# Altium PCB AEGIS_Junction_Box.PcbDoc (part 1 of 2)
Units mm, origin at the board's own origin, x right, y up, seen from the top; angles counter-clockwise.
Board outline 97 x 168.43 mm, 2 copper layers (TOP, BOTTOM), stack 1.57 mm thick; 144 components, 74 nets, 423 pads, 143 vias.
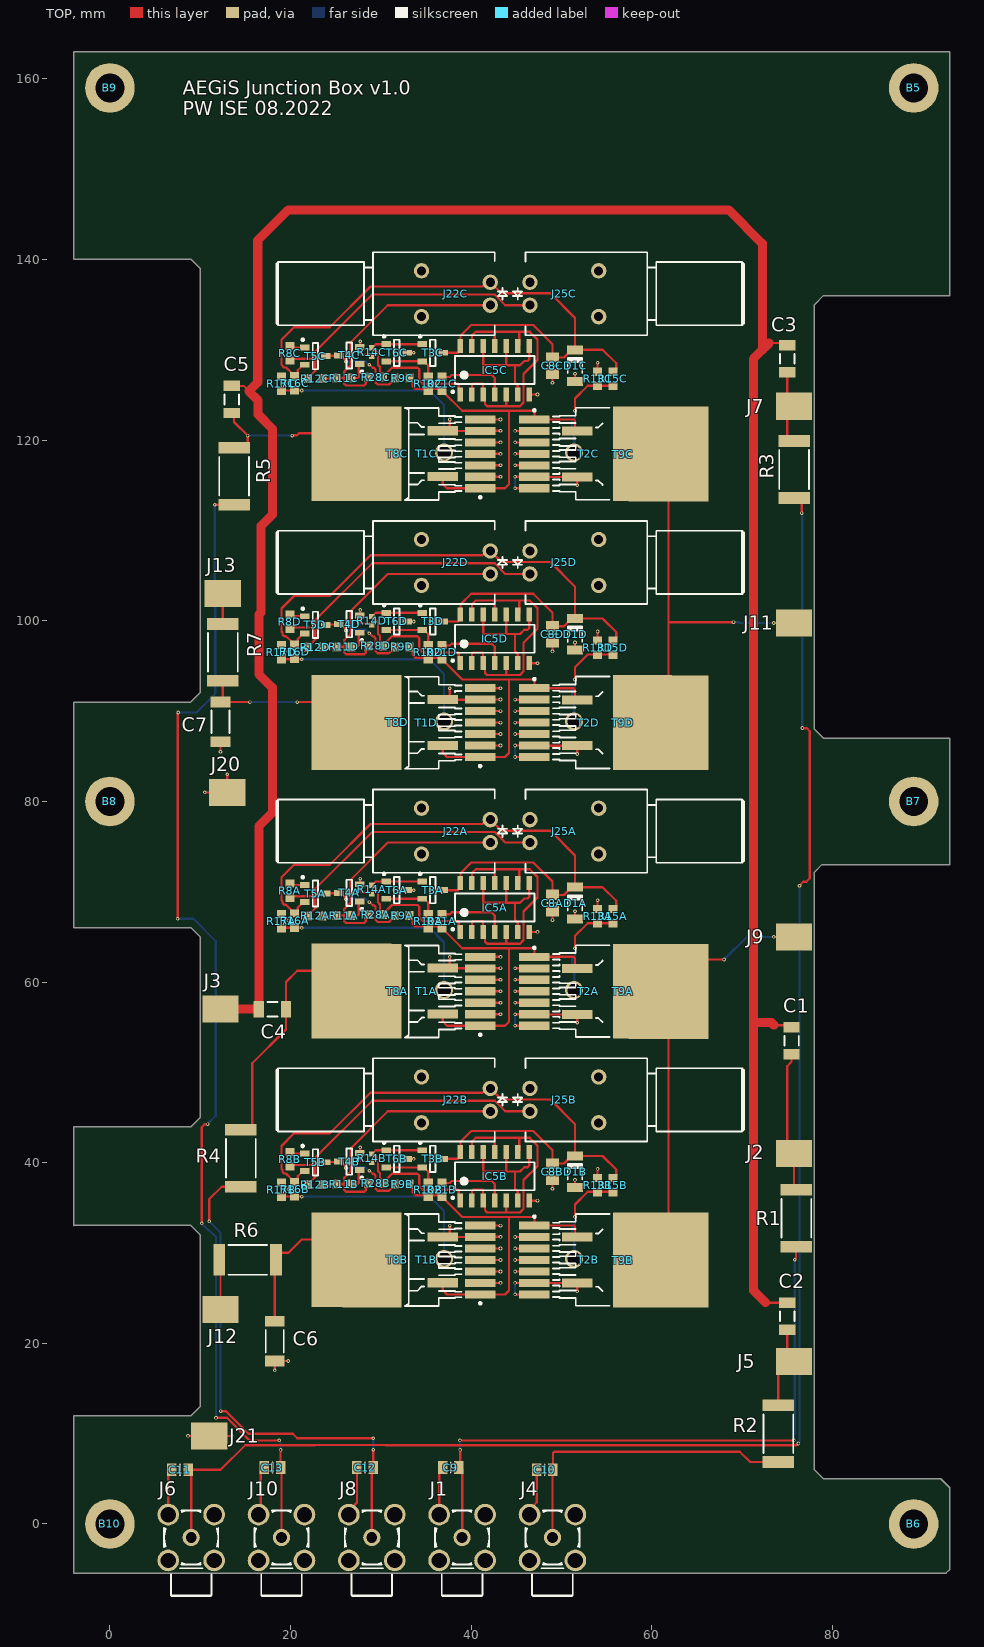
[diagram p0: TOP view]
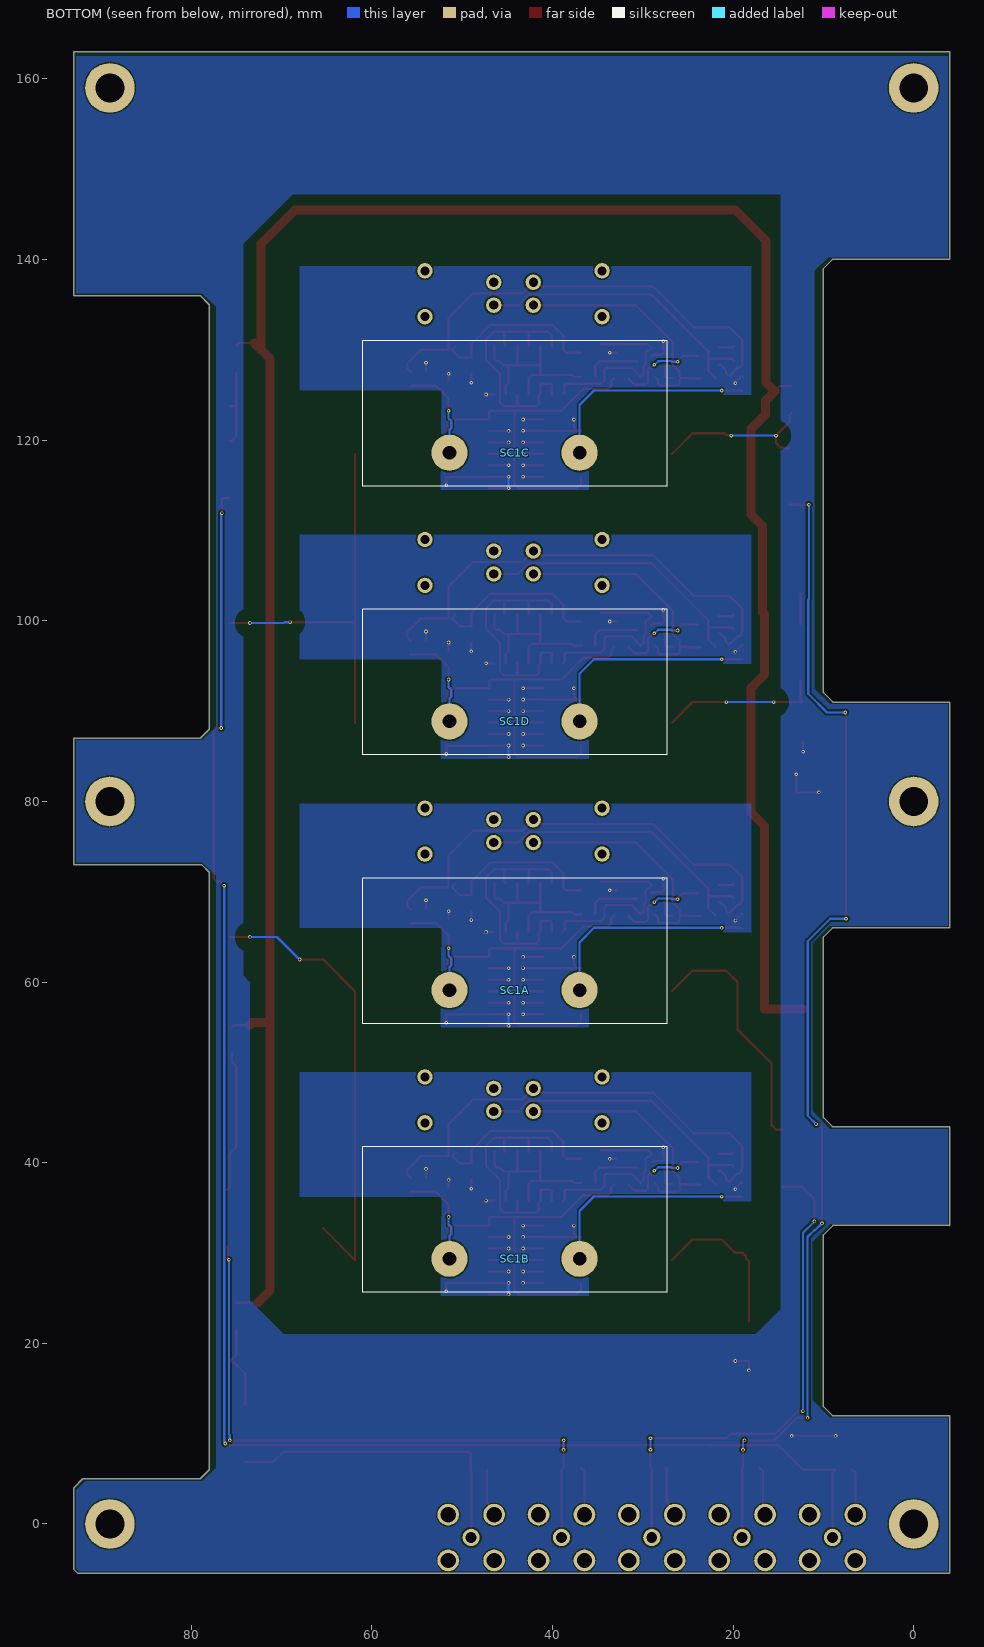
[diagram p1: BOTTOM view, seen from below]
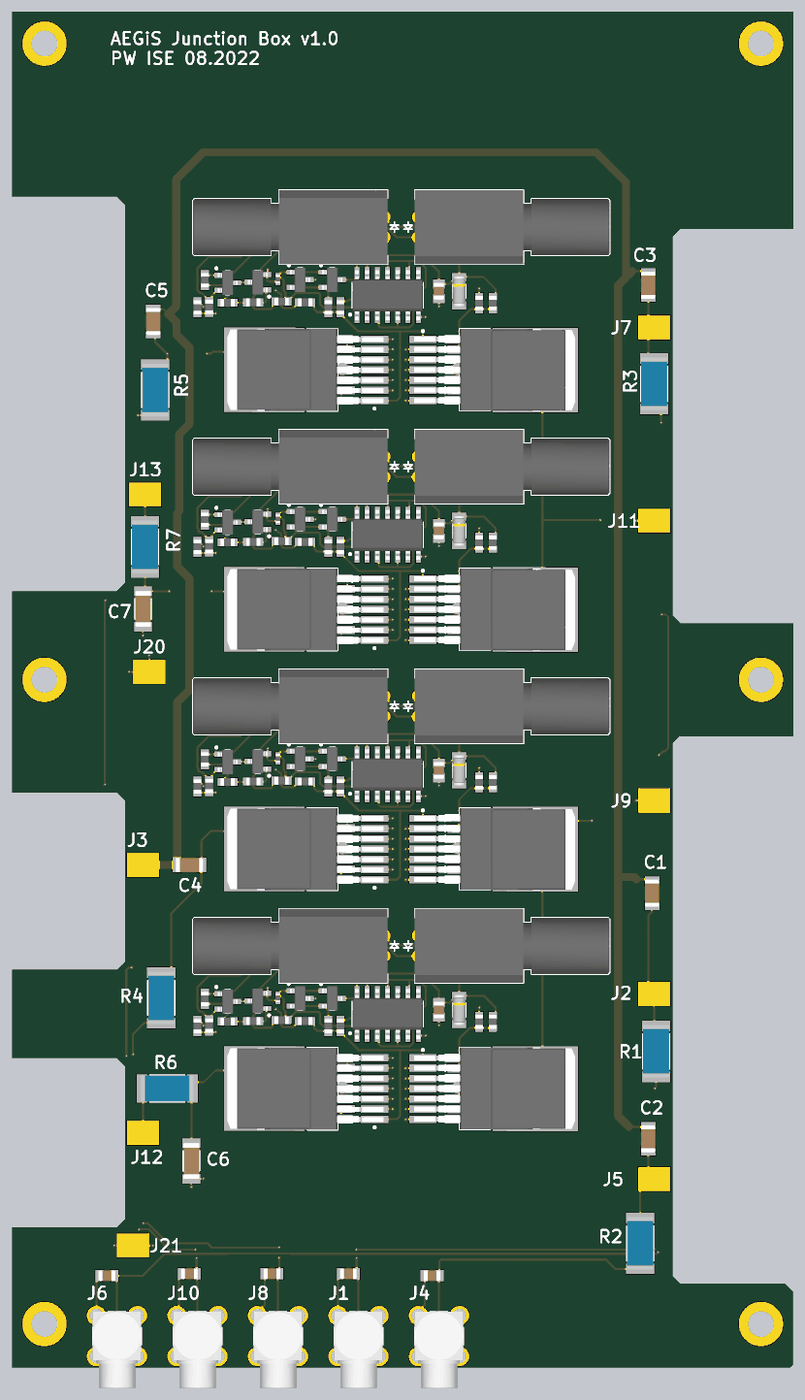
[diagram p2: 3D render of the assembled board from above, using the file's embedded part models]

## Layer stack, top to bottom
TopSolder: solder mask 0.01, Solder Resist, Dk 3.5
TOP: signal copper 0.035
Dielectric 3: prepreg 1.5, FR-4, Dk 4.8
BOTTOM: signal copper 0.035
BottomSolder: solder mask 0.01, Solder Resist, Dk 3.5

## Board outline
-4,-5.428 -4,12 9,12 10,13 10,32 8.95,33.05 -3.95,33.05 -4,33 -4,44 9,44 10,45 10,65 9,66 -4,66 -4,91 8.95,91 10,92.05 10,111 10,139 9,140 -4,140 -4,163 93,163 93,136 79,136 78,135 78,88 79,87 93,87 93,73 78.85,73 78,72.15 78,6 79,5 92,5 92.987,4.013 92.987,-5.025 92.581,-5.431 -3.997,-5.431

## Design rules (kind name [scope] priority, off if disabled: settings)
AcuteAngle [All] p1: minimum=6.00000000000000E+0001 checktracksonly=FALSE
BoardOutlineClearance [All] p1: gap=0.1 ignorepadtopadclearanceinfootprint=FALSE
Clearance Clearance_HV [InNetClass('HV')] p1: gap=1.5 ignorepadtopadclearanceinfootprint=FALSE
Clearance [All] p2: gap=0.2 ignorepadtopadclearanceinfootprint=FALSE
HoleSize [All] p1: absolutevalues=TRUE maxlimit=4 minlimit=0.2 maxpercent=80.000 minpercent=20.000
MinimumSolderMaskSliver [All] p1: minsoldermaskwidth=0.1
PlaneClearance [All] p1: clearance=0.127
PlaneConnect [All] p1: planeconnectstyle=Relief reliefexpansion=0.152 reliefentries=4 reliefconductorwidth=0.152 reliefairgap=0.152
PolygonConnect [All] p1: thpad.connectstyle=Relief thpad.reliefconductorwidth=0.127 thpad.reliefentries=4 thpad.polygonreliefangle="90 Angle" thpad.airgapwidth=0.127 smdpad.connectstyle=Relief smdpad.reliefconductorwidth=0.127 smdpad.reliefentries=4 smdpad.polygonreliefangle="90 Angle" smdpad.airgapwidth=0.127 via.connectstyle=Direct via.reliefconductorwidth=0.127 via.reliefentries=4 via.polygonreliefangle="90 Angle" via.airgapwidth=0.127
RoomDefinition SPDT_HV_SW3 [InComponentClass('SPDT_HV_SW3')] p1: confinementstyle=ConfineIn formatcopy=TRUE lockcomponents=FALSE outline 18,111.5 18,83 70.5,83 70.5,111.5
RoomDefinition SPDT_HV_SW0 [InComponentClass('SPDT_HV_SW0')] p2: confinementstyle=ConfineIn formatcopy=TRUE lockcomponents=FALSE outline 18,81.75 18,53.25 70.5,53.25 70.5,81.75
RoomDefinition AEGIS_Junction_Box [InComponentClass('AEGIS_Junction_Box')] p3 off: confinementstyle=ConfineIn formatcopy=TRUE lockcomponents=FALSE outline 86,-5 78,-5 78,4 86,4
RoomDefinition SPDT_HV_SW2 [InComponentClass('SPDT_HV_SW2')] p4: confinementstyle=ConfineIn formatcopy=TRUE lockcomponents=FALSE outline 18,141.25 18,112.75 70.5,112.75 70.5,141.25
RoomDefinition SPDT_HV_SW1 [InComponentClass('SPDT_HV_SW1')] p5: confinementstyle=ConfineIn formatcopy=TRUE lockcomponents=FALSE outline 18,52 18,23.5 70.5,23.5 70.5,52
RoutingVias [All] p1: holewidth=0.2 width=0.4 viastyle="Through Hole" minholewidth=0.2 minwidth=0.4 maxholewidth=0.711 maxwidth=1.27
SilkToSilkClearance [All] p1: silktosilkclearance=0.01
SilkToSolderMaskClearance [IsPad] p1: minsilkscreentomaskgap=0.01 clearancetoexposedcopper=TRUE
SolderMaskExpansion [All] p1: expansion=0.102 istentingtop=FALSE
Width [All] p1: maxlimit=1.016 minlimit=0.15 preferedwidth=0.2
24 further rules are at their usual default settings.

## Classes and differential pairs
net class HV: "Electrode 1" "Electrode 2" "Electrode 3" "Electrode 4" "Electrode 5" HV_0.7K HV_1K NetC4_2 NetC5_2 NetC6_1 NetC7_1 Resonator
channel class SPDT_FET_SW: SPDT_HV_SW0 SPDT_HV_SW1 SPDT_HV_SW2 SPDT_HV_SW3
component class SPDT_HV_SW3: C8D D1D IC5D J22D J25D R8D R9D R10D R11D R12D R13D R14D R15D R16D R17D R21D R28D SC1D T1D T2D T3D T4D T5D T6D T8D T9D
component class SPDT_HV_SW1: C8B D1B IC5B J22B J25B R8B R9B R10B R11B R12B R13B R14B R15B R16B R17B R21B R28B SC1B T1B T2B T3B T4B T5B T6B T8B T9B
component class SPDT_HV_SW2: C8C D1C IC5C J22C J25C R8C R9C R10C R11C R12C R13C R14C R15C R16C R17C R21C R28C SC1C T1C T2C T3C T4C T5C T6C T8C T9C
component class SPDT_HV_SW0: C8A D1A IC5A J22A J25A R8A R9A R10A R11A R12A R13A R14A R15A R16A R17A R21A R28A SC1A T1A T2A T3A T4A T5A T6A T8A T9A
component class AEGIS_Junction_Box: B5 B6 B7 B8 B9 B10 C1 C2 C3 C4 C5 C6 C7 C9 C10 C11 C12 C13 J1 J2 J3 J4 J5 J6 J7 J8 J9 J10 J11 J12 J13 J20 J21 R1 R2 R3 R4 R5 R6 R7

## Components (designator, comment, footprint, x,y, rotation, side; value= is the part's Value field where it differs from the comment)
B5 "Plated Hole" MTG320_550 89,159 r0 top
B6 "Plated Hole" MTG320_550 89,0 r0 top
B7 "Plated Hole" MTG320_550 89,80 r0 top
B8 "Plated Hole" MTG320_550 0,80 r0 top
B9 "Plated Hole" MTG320_550 0,159 r0 top
B10 "Plated Hole" MTG320_550 0,0 r0 top
C1 "100pF" CAPC3216X180N 75.475,53.5 r270 top
C2 "100pF" CAPC3216X180N 75,23 r270 top
C3 "100pF" CAPC3216X180N 75,129 r270 top
C4 "100pF" CAPC3216X180N 18,57 r0 top
C5 "100pF" CAPC3216X180N 13.5,124.5 r270 top
C6 "470pF" CAPC4520X150N 18.25,20.25 r270 top
C7 "470pF" CAPC4520X150N 12.25,88.8 r270 top
C8A "22uF" CAPC2012X145N 49,68.75 r90 top (schematic designator C8)
C8B "22uF" CAPC2012X145N 49,39 r90 top (schematic designator C8)
C8C "22uF" CAPC2012X145N 49,128.25 r90 top (schematic designator C8)
C8D "22uF" CAPC2012X145N 49,98.5 r90 top (schematic designator C8)
C9 "100pF" CAPC2012X135N 37.75,6.25 r0 top
C10 "100pF" CAPC2012X135N 48.15,6 r0 top
C11 "100pF" CAPC2012X135N 7.75,6 r0 top
C12 "100pF" CAPC2012X135N 28.25,6.25 r0 top
C13 "100pF" CAPC2012X135N 18,6.25 r0 top
D1A "BZV55-B5V1" DIOMELF3515N 51.5,68.75 r270 top (schematic designator D1)
D1B "BZV55-B5V1" DIOMELF3515N 51.5,39 r270 top (schematic designator D1)
D1C "BZV55-B5V1" DIOMELF3515N 51.5,128.25 r270 top (schematic designator D1)
D1D "BZV55-B5V1" DIOMELF3515N 51.5,98.5 r270 top (schematic designator D1)
IC5A "CD40106BM" SOIC127P600X175-14N 42.62,68.25 r90 top (schematic designator IC5)
IC5B "CD40106BM" SOIC127P600X175-14N 42.62,38.5 r90 top (schematic designator IC5)
IC5C "CD40106BM" SOIC127P600X175-14N 42.62,127.75 r90 top (schematic designator IC5)
IC5D "CD40106BM" SOIC127P600X175-14N 42.62,98 r90 top (schematic designator IC5)
J1 "MCX" AMPHENOL_919-383J-51A 39,-1.5 r270 top
J2 "SMD Pad" R400X300 75.75,41 r0 top
J3 "SMD Pad" R400X300 12.25,57 r0 top
J4 "MCX" AMPHENOL_919-383J-51A 49,-1.5 r270 top
J5 "SMD Pad" R400X300 75.75,18 r0 top
J6 "MCX" AMPHENOL_919-383J-51A 9,-1.5 r270 top
J7 "SMD Pad" R400X300 75.75,123.75 r0 top
J8 "MCX" AMPHENOL_919-383J-51A 29,-1.5 r270 top
J9 "SMD Pad" R400X300 75.75,65 r0 top
J10 "MCX" AMPHENOL_919-383J-51A 19,-1.5 r270 top
J11 "SMD Pad" R400X300 75.75,99.75 r0 top
J12 "SMD Pad" R400X300 12.25,23.75 r0 top
J13 "SMD Pad" R400X300 12.5,103 r0 top
J20 "SMD Pad" R400X300 13,81 r0 top
J21 "SMD Pad" R400X300 11,9.75 r0 top
J22A "SFH250V" SFH250V 42.12,76.71 r180 top (schematic designator J22)
J22B "SFH250V" SFH250V 42.12,46.96 r180 top (schematic designator J22)
J22C "SFH250V" SFH250V 42.12,136.21 r180 top (schematic designator J22)
J22D "SFH250V" SFH250V 42.12,106.46 r180 top (schematic designator J22)
J25A "SFH250V" SFH250V 46.5,76.71 r0 top (schematic designator J25)
J25B "SFH250V" SFH250V 46.5,46.96 r0 top (schematic designator J25)
J25C "SFH250V" SFH250V 46.5,136.21 r0 top (schematic designator J25)
J25D "SFH250V" SFH250V 46.5,106.46 r0 top (schematic designator J25)
R1 "10K" RESC6532X80N 76,33.85 r90 top
R2 "10K" RESC6532X80N 74,10 r90 top
R3 "10K" RESC6532X80N 75.75,116.75 r90 top
R4 "10K" RESC6532X80N 14.5,40.5 r90 top
R5 "10K" RESC6532X80N 13.75,116 r90 top
R6 "10K" RESC6532X80N 15.25,29.25 r0 top
R7 "10K" RESC6532X80N 12.5,96.5 r270 top
R8A "10" RESC1608X55N 19.925,70.125 r90 top (schematic designator R8)
R8B "10" RESC1608X55N 19.925,40.375 r90 top (schematic designator R8)
R8C "10" RESC1608X55N 19.925,129.625 r90 top (schematic designator R8)
R8D "10" RESC1608X55N 19.925,99.875 r90 top (schematic designator R8)
R9A "10" RESC1608X55N 32.375,67.368 r0 top (schematic designator R9)
R9B "10" RESC1608X55N 32.375,37.618 r0 top (schematic designator R9)
R9C "10" RESC1608X55N 32.375,126.868 r0 top (schematic designator R9)
R9D "10" RESC1608X55N 32.375,97.118 r0 top (schematic designator R9)
R10A "10" RESC1608X55N 35.25,66.75 r270 top (schematic designator R10)
R10B "10" RESC1608X55N 35.25,37 r270 top (schematic designator R10)
R10C "10" RESC1608X55N 35.25,126.25 r270 top (schematic designator R10)
R10D "10" RESC1608X55N 35.25,96.5 r270 top (schematic designator R10)
R11A "10" RESC1608X55N 25.918,67.368 r0 top (schematic designator R11)
R11B "10" RESC1608X55N 25.918,37.618 r0 top (schematic designator R11)
R11C "10" RESC1608X55N 25.918,126.868 r0 top (schematic designator R11)
R11D "10" RESC1608X55N 25.918,97.118 r0 top (schematic designator R11)
R12A "10" RESC1608X55N 22.75,67.318 r0 top (schematic designator R12)
R12B "10" RESC1608X55N 22.75,37.568 r0 top (schematic designator R12)
R12C "10" RESC1608X55N 22.75,126.818 r0 top (schematic designator R12)
R12D "10" RESC1608X55N 22.75,97.068 r0 top (schematic designator R12)
R13A "Undefined" RESC1608X55N 54,67.275 r90 top (schematic designator R13)
R13B "Undefined" RESC1608X55N 54,37.525 r90 top (schematic designator R13)
R13C "Undefined" RESC1608X55N 54,126.775 r90 top (schematic designator R13)
R13D "Undefined" RESC1608X55N 54,97.025 r90 top (schematic designator R13)
R14A "1M" RESC1005X40N 29,70.25 r90 top (schematic designator R14)
R14B "1M" RESC1005X40N 29,40.5 r90 top (schematic designator R14)
R14C "1M" RESC1005X40N 29,129.75 r90 top (schematic designator R14)
R14D "1M" RESC1005X40N 29,100 r90 top (schematic designator R14)
R15A "0" RESC1608X55N 55.69,67.275 r90 top (schematic designator R15)
R15B "0" RESC1608X55N 55.69,37.525 r90 top (schematic designator R15)
R15C "0" RESC1608X55N 55.69,126.775 r90 top (schematic designator R15)
R15D "0" RESC1608X55N 55.69,97.025 r90 top (schematic designator R15)
R16A "Undefined" RESC1608X55N 20.45,66.81 r90 top (schematic designator R16)
R16B "Undefined" RESC1608X55N 20.45,37.06 r90 top (schematic designator R16)
R16C "Undefined" RESC1608X55N 20.45,126.31 r90 top (schematic designator R16)
R16D "Undefined" RESC1608X55N 20.45,96.56 r90 top (schematic designator R16)
R17A "0" RESC1608X55N 19,66.75 r90 top (schematic designator R17)
R17B "0" RESC1608X55N 19,37 r90 top (schematic designator R17)
R17C "0" RESC1608X55N 19,126.25 r90 top (schematic designator R17)
R17D "0" RESC1608X55N 19,96.5 r90 top (schematic designator R17)
R21A "10" RESC1608X55N 36.75,66.75 r270 top (schematic designator R21)
R21B "10" RESC1608X55N 36.75,37 r270 top (schematic designator R21)
R21C "10" RESC1608X55N 36.75,126.25 r270 top (schematic designator R21)
R21D "10" RESC1608X55N 36.75,96.5 r270 top (schematic designator R21)
R28A "0" RESC1608X55N 29.445,67.475 r0 top (schematic designator R28)
R28B "0" RESC1608X55N 29.445,37.725 r0 top (schematic designator R28)
R28C "0" RESC1608X55N 29.445,126.975 r0 top (schematic designator R28)
R28D "0" RESC1608X55N 29.445,97.225 r0 top (schematic designator R28)
SC1A "SM340K10L" SM340K10L 27.3,55.41 r0 bottom (schematic designator SC1)
SC1B "SM340K10L" SM340K10L 27.3,25.66 r0 bottom (schematic designator SC1)
SC1C "SM340K10L" SM340K10L 27.3,114.91 r0 bottom (schematic designator SC1)
SC1D "SM340K10L" SM340K10L 27.3,85.16 r0 bottom (schematic designator SC1)
T1A "C2M1000170J" WOLFSPEED_TO-263-7 32.922,58.965 r90 top (schematic designator T1)
T1B "C2M1000170J" WOLFSPEED_TO-263-7 32.922,29.215 r90 top (schematic designator T1)
T1C "C2M1000170J" WOLFSPEED_TO-263-7 32.922,118.465 r90 top (schematic designator T1)
T1D "C2M1000170J" WOLFSPEED_TO-263-7 32.922,88.715 r90 top (schematic designator T1)
T2A "C2M1000170J" WOLFSPEED_TO-263-7 55.078,58.995 r270 top (schematic designator T2)
T2B "C2M1000170J" WOLFSPEED_TO-263-7 55.078,29.245 r270 top (schematic designator T2)
T2C "C2M1000170J" WOLFSPEED_TO-263-7 55.078,118.495 r270 top (schematic designator T2)
T2D "C2M1000170J" WOLFSPEED_TO-263-7 55.078,88.745 r270 top (schematic designator T2)
T3A "BC847C" SOT95P240X110-3N 35.75,70.175 r0 top (schematic designator T3)
T3B "BC847C" SOT95P240X110-3N 35.75,40.425 r0 top (schematic designator T3)
T3C "BC847C" SOT95P240X110-3N 35.75,129.675 r0 top (schematic designator T3)
T3D "BC847C" SOT95P240X110-3N 35.75,99.925 r0 top (schematic designator T3)
T4A "BC847C" SOT95P240X110-3N 26.5,69.875 r180 top (schematic designator T4)
T4B "BC847C" SOT95P240X110-3N 26.5,40.125 r180 top (schematic designator T4)
T4C "BC847C" SOT95P240X110-3N 26.5,129.375 r180 top (schematic designator T4)
T4D "BC847C" SOT95P240X110-3N 26.5,99.625 r180 top (schematic designator T4)
T5A "BC857C" SOT95P240X110-3N 22.75,69.8 r0 top (schematic designator T5)
T5B "BC857C" SOT95P240X110-3N 22.75,40.05 r0 top (schematic designator T5)
T5C "BC857C" SOT95P240X110-3N 22.75,129.3 r0 top (schematic designator T5)
T5D "BC857C" SOT95P240X110-3N 22.75,99.55 r0 top (schematic designator T5)
T6A "BC857C" SOT95P240X110-3N 31.75,70.175 r0 top (schematic designator T6)
T6B "BC857C" SOT95P240X110-3N 31.75,40.425 r0 top (schematic designator T6)
T6C "BC857C" SOT95P240X110-3N 31.75,129.675 r0 top (schematic designator T6)
T6D "BC857C" SOT95P240X110-3N 31.75,99.925 r0 top (schematic designator T6)
T8A "IXTA02N250HV" IXYS_TO-263AB 30.438,59 r180 top (schematic designator T8)
T8B "IXTA02N250HV" IXYS_TO-263AB 30.438,29.25 r180 top (schematic designator T8)
T8C "IXTA02N250HV" IXYS_TO-263AB 30.438,118.5 r180 top (schematic designator T8)
T8D "IXTA02N250HV" IXYS_TO-263AB 30.438,88.75 r180 top (schematic designator T8)
T9A "IXTA02N250HV" IXYS_TO-263AB 58.162,58.96 r0 top (schematic designator T9)
T9B "IXTA02N250HV" IXYS_TO-263AB 58.162,29.21 r0 top (schematic designator T9)
T9C "IXTA02N250HV" IXYS_TO-263AB 58.162,118.46 r0 top (schematic designator T9)
T9D "IXTA02N250HV" IXYS_TO-263AB 58.162,88.71 r0 top (schematic designator T9)

## Footprints (in the part's own frame and the unit in brackets; to place one, negate y for a bottom-side part, rotate by r counter-clockwise, add the part's x,y. Pads: shape width x height; smd on the part's side, far side on the other; paste and mask are expansions set on the pad)
AMPHENOL_919-383J-51A [mm] "50 Ohm, RF Connector, MCX Right Angle PCB Receptacle Jack"
  round 1.9 hole 1.2: 1(0,0)
  round 2.4 hole 1.7: 2(-2.54,2.54) 2(-2.54,-2.54) 2(2.54,2.54) 2(2.54,-2.54)
  silkscreen extent -3,-3 6.5,3, body extent -3,-3 6.5,3, height 6
CAPC2012X135N [mm] "Chip Capacitor, Body 2.0x1.25mm, IPC Medium Density"
  rect 1.05x1.4 smd: 1(-0.9,0) 2(0.9,0)
  silkscreen extent 0,-0.58 0,0.58, body extent -1.05,-0.67 1.05,0.68, height 1.25
CAPC2012X145N [mm] "Chip Capacitor, Body 2.0x1.45mm, IPC Medium Density"
  rect 1.15x1.45 smd: 1(-0.9,0) 2(0.9,0)
  silkscreen extent 0,-0.58 0,0.58, body extent -1.05,-0.67 1.05,0.68, height 1.45
CAPC3216X180N [mm] "Chip Capacitor, Body 3.2x1.6mm, IPC Medium Density"
  rect 1.15x1.8 smd: 1(-1.5,0) 2(1.5,0)
  silkscreen extent -0.55,-0.8 0.55,0.8, body extent -1.7,-0.9 1.7,0.9, height 1.8
CAPC4520X150N [mm] "Capacitor, Non-Polarized, Chip;4.50mm L X 2.00mm W X 1.50mm H, IPC Medium Density"
  rect 1.2x2.2 smd: 1(-2.2,0) 2(2.2,0)
  silkscreen extent -1.25,-1 1.25,1, body extent -2.25,-1 2.25,1, height 1.5
DIOMELF3515N [mm] "SOD80C, MELF Diode, 2-Leads, Body 3.5x1.5mm, IPC Medium Density"
  rect 1x1.75 smd: 1(-1.75,0) 2(1.75,0)
  silkscreen extent -0.85,-0.8 0.85,0.8, body extent -1.85,-0.8 1.85,0.8, height 1.6
IXYS_TO-263AB [mm] "IXYS D3Pak-HV TO-268AA TO, 5.45mm Pitch; 2 Pin,18.90mm L X 14.975mm W X 5.10mm H Body"
  rect 3.4x1 smd: 1(-6.412,2.54) 2(-6.412,-2.54)
  rect 8.85x10.5 smd: 3(3.688,0)
  silkscreen extent -4.36,-5 -2.41,5, body extent -7.56,-5 7.74,5, height 4.7
MTG320_550 [mm] "Plated Through Hole: Hole Dia.=3.2mm Pad Dia.=5.5mm"
  round 5.5 hole 3.2: 1(0,0)
R400X300 [mm] "4mm x  3mm SMD Pad"
  rect 4x3 smd paste-1.5: 1(0,0)
RESC1005X40N [mm] "Chip Resistor, EIA 0402, Metric 1005, Body 1.0x0.5mm, IPC Medium Density"
  rect 0.58x0.62 smd: 1(-0.47,0) 2(0.47,0)
  body extent -0.52,-0.27 0.53,0.28, height 0.4
RESC1608X55N [mm] "Chip Resistor, EIA 0603, Metric 1608, Body 1.6x0.8mm, IPC Medium Density"
  rect 0.9x1 smd: 1(-0.8,0) 2(0.8,0)
  body extent -0.87,-0.47 0.88,0.48, height 0.55
RESC6532X80N [mm] "Resistor, Chip; 6.5mm L X 3.25mm W X 0.80mm H, IPC Medium Density"
  rect 1.3x3.5 smd: 1(-3.15,0) 2(3.15,0)
  silkscreen extent -2.15,-1.65 2.15,1.65, body extent -3.25,-1.62 3.25,1.63, height 0.8
SFH250V [mm] "100MBd Analog Receiver Diode with Direct Fiber Connector"
  round 1.7 hole 1: 1(0,1.27) 2(0,-1.27) 3(7.62,-2.54) 4(7.62,2.54)
  silkscreen extent -1.85,-4.6 23.7,4.6, body extent -0.5,-4.6 23.7,4.6, height 8.6
SM340K10L [mm] "MONOCRYS SOLAR CELL 73.5MW"
  round 4 smd: N(9.7,-3.7) P(24.1,-3.7)
  silkscreen extent 0,-16.1 33.7,0, body extent 0,-16.1 33.7,0, height 1.8
SOIC127P600X175-14N [mm] "SOIC 14, Pitch 1.27mm - Body 4x8.75mm, IPC Medium Density"
  rect 1.55x0.6 smd: 1(-2.7,3.81) 2(-2.7,2.54) 3(-2.7,1.27) 4(-2.7,0) 5(-2.7,-1.27) 6(-2.7,-2.54) 7(-2.7,-3.81) 8(2.7,-3.81) 9(2.7,-2.54) 10(2.7,-1.27) 11(2.7,0) 12(2.7,1.27) 13(2.7,2.54) 14(2.7,3.81)
  silkscreen extent -2.52,-4.4 1.55,4.78, body extent -3.1,-4.37 3.1,4.38, height 1.75
SOT95P240X110-3N [mm] "SOT23 3-Leads, Pitch 0.95mm, Body 1.3x2.9mm, IPC Medium Density"
  rect 1.05x0.65 smd: 1(-1.15,0.95) 2(-1.15,-0.95) 3(1.15,0)
  silkscreen extent -1.52,-1.45 0.3,1.92, body extent -1.25,-1.5 1.25,1.5, height 1.1
WOLFSPEED_TO-263-7 [mm]
  rect 0.9x3.4 smd: 1(-3.795,-8.078) 2(-2.525,-8.078) 3(-1.255,-8.078) 4(0.015,-8.078) 5(1.285,-8.078) 6(2.555,-8.078) 7(3.825,-8.078)
  rect 10.48x6.538 smd: 8(0.015,3.881)
  silkscreen extent -5.09,-8.2 5.09,0.26, body extent -5.09,-9.18 5.09,7, height 4.5

## Part data
B5 B6 B7 B8 B9 B10: library part PLATED_HOLE3.2_PAD5.5, "Single Terminal Socket", Author="CERN DEM JMW", Component Type="Standard (No BOM)", ComponentHeight=0mm, CreateDate=01.10.2012, Family="Plated Hole", HelpURL=Undefined, LatestRevisionDate=01.10.2012, Mounted=No, PackageDescription="Plated Through Hole: Hole Dia.=3.2mm Pad Dia.=5.5mm", Part Description="Plated Through Hole: Hole Dia.=3.2mm Pad Dia.=5.5mm", Part Number=PLATED_HOLE3.2_PAD5.5, Pin Count=1, Sense=No, SMD=No, Socket=No, Status=None
C1 C2 C3 C4 C5: library part CC1206_100PF_2KV_5%_C0G, "Non-polarised capacitor", Case=1206, Manufacturer=GENERIC, Manufacturer1 ComponentHeight=1.8mm, Manufacturer1 Example=AVX, Manufacturer1 Part Number=1206GA101JAT2A, Tolerance=±5%, Voltage=2kV, Author="CERN DEM JLC", Component Type=Standard, CreateDate=17.05.2017, HelpURL=\\cern.ch\dfs\Applications\Altium\Datasheets\CC1206_C0G_AVX_HV-MLC.pdf, LatestRevisionDate=17.05.2017, Manufacturer Part Number=CC1206_100PF_2KV_5%_C0G, Mounted=Yes, Part Description="High Voltage MLC Chip Capacitor", Part Number=CC1206_100PF_2KV_5%_C0G, Pin Count=2, Sense=No, SMD=Yes, Socket=No, Status=None, TC=C0G/NP0
C6 C7: library part CC1808_470PF_2KV_20%_X7R_TDK_CGA7K1X7R3D471M130KA, "Non-polarised capacitor", Case=1808, Manufacturer=TDK, Manufacturer Part Number=CGA7K1X7R3D471M130KA, Tolerance=±20%, Voltage=2kV, Author="CERN DEM JLC", Component Type=Standard, ComponentHeight=1.5mm, CreateDate=30.11.2016, HelpURL=\\cern.ch\dfs\Applications\Altium\Datasheets\CC1808_X7R_TDK_CGA-HV.pdf, LatestRevisionDate=30.11.2016, Mounted=Yes, Part Description="High Voltage SMD Multilayer Chip Ceramic Capacitor (Automotive Grade)", Part Number=CC1808_470PF_2KV_20%_X7R_TDK_CGA7K1X7R3D471M130KA, Pin Count=2, Sense=No, SMD=Yes, Socket=No, Status="Not Recommended", TC=X7R
C8A C8B C8C C8D: library part CC0805_22UF_25V_20%_X5R, "Non-polarised capacitor", Case=0805, Manufacturer=GENERIC, Manufacturer1 ComponentHeight=1.45mm, Manufacturer1 Example=MURATA, Manufacturer1 Part Number=GRM21BR61E226ME44, Tolerance=±20%, Voltage=25V, Author="CERN DEM WB", Component Type=Standard, ComponentHeight=1.45mm, CreateDate=08.10.2021, HelpURL=\\cern.ch\dfs\Applications\Altium\Datasheets\CC0805_MURATA_GRM21BR61E226ME44.pdf, LatestRevisionDate=08.10.2021, Manufacturer Part Number=CC0805_22UF_25V_20%_X5R, Mounted=Yes, Part Description="Chip Multilayer Ceramic Capacitor for General Purpose", Part Number=CC0805_22UF_25V_20%_X5R, Pin Count=2, Sense=No, SMD=Yes, Socket=No, Status=Preferred, TC=X5R
C9 C10 C11 C12 C13: library part CC0805_100PF_50V_5%_NP0, "Non-polarised capacitor", Case=0805, Manufacturer=GENERIC, Manufacturer1 ComponentHeight=1.35mm, Manufacturer1 Example=PHYCOMP, Manufacturer1 Part Number=223886115101, Tolerance=±5%, Voltage=50V, Author="CERN DEM JLC", Component Type=Standard, CreateDate=03.12.2007, HelpURL=\\cern.ch\dfs\Applications\Altium\Datasheets\CC0805_NP0_PHYCOMP.pdf, LatestRevisionDate=03.12.2007, Manufacturer Part Number=CC0805_100PF_50V_5%_NP0, Mounted=Yes, Part Description="SMD Multilayer Chip Ceramic Capacitor", Part Number=CC0805_100PF_50V_5%_NP0, Pin Count=2, Sense=No, SMD=Yes, Socket=No, Status=Preferred, TC=C0G/NP0
D1A D1B D1C D1D: "Zener Diode", Case=SOD-80C, Manufacturer=NEXPERIA, Power=500mW, Voltage=5V1, Author="CERN DEM JLC", Bonding=No, Component Type=Standard, ComponentHeight=1.6mm, CreateDate=06.05.2008, Device=BZV55-B5V1, HelpURL=\\cern.ch\dfs\Applications\Altium\Datasheets\BZV55.pdf, LatestRevisionDate=22.01.2018, Manufacturer Part Number=BZV55-B5V1, Mounted=Yes, PackageDescription="SOD80C, MELF Diode, 2-Leads, Body 3.5x1.5mm, IPC Medium Density", Part Description="Voltage Regulator Diode", Part Number=BZV55-B5V1, Pin Count=2, PressFit=No, Sense=No, SMD=Yes, Socket=No
IC5A IC5B IC5C IC5D: "Hex Inverting Schmitt-Trigger", Case=SOIC14, Manufacturer="TEXAS INSTRUMENTS", Author="CERN DEM JLC", Bonding=No, Component Type=Standard, ComponentHeight=1.75mm, CreateDate=17.01.2012, Device=CD40106BM, HelpURL=\\cern.ch\dfs\Applications\Altium\Datasheets\CD40106BM.pdf, LatestRevisionDate=17.01.2012, Manufacturer Part Number=CD40106BM, Mounted=Yes, PackageDescription="SOIC 14, Pitch 1.27mm - Body 4x8.75mm, IPC Medium Density", Part Description="CMOS Hex Schmitt Triggers", Part Number=CD40106BM, Pin Count=14, PressFit=No, Sense=No, SMD=Yes, Socket=No
J1 J4 J6 J8 J10: library part AMPHENOL_919-383J-51A, Manufacturer=AMPHENOL, Manufacturer Part Number=919-383J-51A, Author="CERN DEM BC", Component Type=Standard, ComponentHeight=6mm, CreateDate=31.01.2019, Family=MCX, HelpURL=\\cern.ch\dfs\Applications\Altium\Datasheets\AMPHENOL_919-383J-51A.pdf, LatestRevisionDate=31.01.2019, Mounted=Yes, Part Description="50 Ohm, RF Connector, MCX Right Angle PCB Receptacle Jack", Part Number=AMPHENOL_919-383J-51A, Pin Count=5, PressFit=No, Sense=No, SMD=No, Socket=No, Status=None
J2 J3 J5 J7 J9 J11 J12 J13 J20 J21: library part SMD_PAD_4X3MM, "Single SMD Pad", Author="CERN DEM JLC", Component Type="Standard (No BOM)", ComponentHeight=0mm, CreateDate=15.03.2010, Family="SMD Pad", HelpURL=Undefined, LatestRevisionDate=15.03.2010, Mounted=No, PackageDescription="4mm x  3mm SMD Pad", Part Description="4mm x 3mm SMD Pad", Part Number=SMD_PAD_4X3MM, Pin Count=1, Sense=No, SMD=No, Socket=No, Status=None
J22A J22B J22C J22D J25A J25B J25C J25D: "Plastic Connector Housing For Plastic Fiber Optic Photodiode Detector", Manufacturer="AVAGO TECHNOLOGIES", Manufacturer Part Number="SFH250V or SP000063852", Author="CERN DEM JLC", Component Type=Standard, ComponentHeight=9mm, CreateDate=07.10.2010, Device=SFH250V, Family="Optical Fiber", HelpURL=\\cern.ch\dfs\Applications\Altium\Datasheets\SFH250V.pdf, LatestRevisionDate=21.08.2014, Mounted=Yes, Part Description="100MBd Analog Receiver Diode with Direct Fiber Connector", Part Number=SFH250V, Pin Count=2, PressFit=No, Sense=No, SMD=No, Socket=No, Status=None
R1 R2 R3 R4 R5 R6 R7: library part R2512_10k_1%_1W_100PPM, "High Voltage (3kV) Chip Resistor", Case=2512, Manufacturer="TT Electronics", Manufacturer Part Number=HVC2512-10KFT18, Part Number=R2512_2M_1%_1W_100PPM, Power=1W, Tolerance=±1%, Author=GK, Component Type=Standard, ComponentHeight=0.8mm, CreateDate=26.11.2014, HelpURL="\\cern.ch\dfs\Applications\Altium\Datasheets\R2512_TT ELECTRONICS_HVC.pdf", LatestRevisionDate=26.11.2014, Mounted=Yes, Part Description="High Voltage (3kV) Chip Resistor", Pin Count=2, PressFit=No, Sense=No, SMD=Yes, Socket=No, Status=None, TC=±100ppm/°C
R8A R8B R8C R8D R9A R9B R9C R9D R10A R10B R10C R10D R11A R11B R11C R11D R12A R12B R12C R12D R21A R21B R21C R21D: library part R0603_10R_1%_0.1W_200PPM, "Resistor - 1%", Case=0603, Manufacturer=GENERIC, Manufacturer1 ComponentHeight=0.55mm, Manufacturer1 Example="NIC COMPONENT", Manufacturer1 Part Number=NRC06F10R0TRF, Power=0.1W, Tolerance=±1%, Author="CERN DEM JLC", Component Type=Standard, CreateDate=03.12.2007, HelpURL=\\cern.ch\dfs\Applications\Altium\Datasheets\R0603_NIC_NRC.pdf, LatestRevisionDate=24.06.2009, Manufacturer Part Number=R0603_10R_1%_0.1W_200PPM, Mounted=Yes, Part Description="General Purpose Thick Film Chip Resistor", Part Number=R0603_10R_1%_0.1W_200PPM, Pin Count=2, PressFit=No, Sense=No, SMD=Yes, Socket=No, Status=Preferred, TC=±200ppm/°C
R13A R13B R13C R13D R16A R16B R16C R16D: library part R0603_NO-VALUE, "Resistor", Case=0603, Author="CERN DEM JLC", Component Type=Standard, CreateDate=03.12.2007, HelpURL=Undefined, LatestRevisionDate=13.03.2008, Manufacturer=Undefined, Manufacturer1 ComponentHeight=Undefined, Manufacturer1 Example=Undefined, Manufacturer1 Part Number=Undefined, Manufacturer Part Number=R0603_NO-VALUE, Mounted=No, Part Description="Reserved Footprint For a 0603 (1608) Chip Resistor", Part Number=R0603_NO-VALUE, Pin Count=2, PressFit=No, Sense=No, SMD=Yes, Socket=No, Status=None
R14A R14B R14C R14D: library part R0402_1M_1%_0.0625W_100PPM, "Resistor - 1%", Case=0402, Manufacturer=GENERIC, Manufacturer1 ComponentHeight=0.4mm, Manufacturer1 Example="YAGEO PHYCOMP", Manufacturer1 Part Number=232270671005L, Power=0.0625W, Tolerance=±1%, Author="CERN DEM JLC", Component Type=Standard, CreateDate=03.12.2007, HelpURL=\\cern.ch\dfs\Applications\Altium\Datasheets\R0402_Phycomp_RC0402.pdf, LatestRevisionDate=17.10.2012, Manufacturer Part Number=R0402_1M_1%_0.0625W_100PPM, Mounted=Yes, Part Description="General Purpose Thick Film Chip Resistor", Part Number=R0402_1M_1%_0.0625W_100PPM, Pin Count=2, PressFit=No, Sense=No, SMD=Yes, Socket=No, Status="Not Recommended", TC=±100ppm/°C
R15A R15B R15C R15D R17A R17B R17C R17D R28A R28B R28C R28D: library part R0603_0R_JUMPER, "Resistor", Case=0603, Manufacturer=GENERIC, Manufacturer1 ComponentHeight=0.55mm, Manufacturer1 Example="NIC COMPONENT", Manufacturer1 Part Number=NRC06Z0, Author="CERN DEM JLC", Component Type=Standard, CreateDate=03.12.2007, HelpURL=\\cern.ch\dfs\Applications\Altium\Datasheets\R0603_NIC_NRC.pdf, LatestRevisionDate=13.03.2008, Manufacturer Part Number=R0603_0R_JUMPER, Mounted=Yes, Part Description="1A (0.05R Max DC Resistance) Zero Ohm Jumper", Part Number=R0603_0R_JUMPER, Pin Count=2, PressFit=No, Sense=No, SMD=Yes, Socket=No, Status=Preferred
SC1A SC1B SC1C SC1D: library part SOLAR_SM340K10L, "MONOCRYSTAL SOLAR CELL 73.5MW 6.91V", Case=33x16, Manufacturer=ANYSOLAR, Author=GK, Bonding=No, Component Type=Standard, ComponentHeight=2, CreateDate=07.06.2022, Device=SM340K10L, HelpURL=\\cern.ch\dfs\Applications\Altium\Datasheets\TLP3910.pdf, LatestRevisionDate=07.06.2022, Manufacturer Part Number=SM340K10L, Mounted=Yes, PackageDescription="ANYSOLAR 34,0mm x 16,0mm x 2,0mm", Part Description="MONOCRYSTAL SOLAR CELL 73.5MW 6.91V", Part Number=SM340K10L, Pin Count=6, PressFit=No, Sense=No, SMD=Yes, Socket=No
T1A T1B T1C T1D T2A T2B T2C T2D: "N-CHANNEL MOSFET WITH DIODE", Case=TO-263-7, Manufacturer=WOLFSPEED, Author="CERN DEM HF", Bonding=No, Component Type=Standard, ComponentHeight=4.570, CreateDate=07.06.2022, Device=C2M1000170J, HelpURL=\\cern.ch\dfs\Applications\Altium\Datasheets\C2M1000170J.pdf, LatestRevisionDate=07.06.2022, Manufacturer Part Number=C2M1000170J, Mounted=Yes, PackageDescription="TO-263-7, 1.27mm Pitch; 7 Pin,10.18mm W X 11.60mm L X 4.57mm H body", Part Description="1700V, 5.3A, Silicon Carbide Power MOSFET C2M", Part Number=C2M1000170J, Pin Count=8, PressFit=No, Sense=No, SMD=Yes, Socket=No
T3A T3B T3C T3D T4A T4B T4C T4D: "NPN Transistor", Case=SOT23-3, Manufacturer=INFINEON, Author="CERN DEM JLC", Bonding=No, Component Type=Standard, ComponentHeight=1.1mm, CreateDate=23.09.2014, Device=BC847C, HelpURL=\\cern.ch\dfs\Applications\Altium\Datasheets\BC847C.pdf, LatestRevisionDate=23.09.2014, Manufacturer Part Number=BC847C, Mounted=Yes, PackageDescription="SOT23, 0.95mm Pitch; 3 Pin, 1.40mm W X 3.00mm L X 1.10mm H body, IPC Medium Density", Part Description="45V 100mA NPN Silicon AF Transistor", Part Number=BC847C, Pin Count=3, PressFit=No, Sense=No, SMD=Yes, Socket=No
T5A T5B T5C T5D T6A T6B T6C T6D: "PNP Transistor", Case=SOT23-3, Manufacturer=INFINEON, Author="CERN DEM JLC", Bonding=No, Component Type=Standard, ComponentHeight=1.1mm, CreateDate=23.09.2014, Device=BC857C, HelpURL=\\cern.ch\dfs\Applications\Altium\Datasheets\BC857C.pdf, LatestRevisionDate=23.09.2014, Manufacturer Part Number=BC857C, Mounted=Yes, PackageDescription="SOT23, 0.95mm Pitch; 3 Pin, 1.40mm W X 3.00mm L X 1.10mm H body, IPC Medium Density", Part Description="-45V -100mA PNP  Silicon AF Transistor", Part Number=BC857C, Pin Count=3, PressFit=No, Sense=No, SMD=Yes, Socket=No
T8A T8B T8C T8D T9A T9B T9C T9D: "N-CHANNEL MOSFET WITH DIODE", Case=TO-263AB, Manufacturer=IXYS, Author="CERN DEM HF", Bonding=No, Component Type=Standard, ComponentHeight=4.70mm, CreateDate=08.06.2022, Device=IXTA02N250HV, HelpURL=\\cern.ch\dfs\Applications\Altium\Datasheets\IXTA02N250HV.pdf, LatestRevisionDate=08.06.2022, Manufacturer Part Number=TO-263AB, Mounted=Yes, PackageDescription="D2PAK TO-263AB TO, 5.08mm Pitch; 2 Pin, 15.30mm L X 10.00mm W X 4.7mm H body", Part Description="2600V 0.2A N-Channel Power MOSFET", Part Number=IXTA02N250HV, Pin Count=3, PressFit=No, Sense=No, SMD=Yes, Socket=No

## Via types
v1: diameter 0.4, hole 0.2, TOP to BOTTOM, tented both sides, 135 vias
v2: diameter 2, hole 1.5, TOP to BOTTOM, tented both sides, 8 vias

## Nets (pads, with @x,y where several pads share a name; then routed paths per layer and width w, separated by ;. In a path a pad name is that pad's centre, name@x,y a point inside that pad or via, vN(x,y) a via of type N, cw(c..) or ccw(c..) an arc to the next point about the centre after c; other vN are vias at no path point)
DC_IN1: C11.2 J6.1 R3.1 | length 183.3
  TOP w0.25: J6.1 9,5.65 C11.2 12.25,6 14.975,8.725 22.719,8.725 22.744,8.75 30.488,8.75 30.513,8.725 76,8.725 76.186,8.911 v1(76.227,8.911) ; R3.1 76.475,113.6 76.6,113.475 v1(76.6,111.92) ; v1(76.35,70.67) 76.779,71.1 77.1,71.1 77.5,71.5 77.5,87.773 77.179,88.095 76.699,88.095 v1(76.67,88.123)
  BOTTOM w0.25: v1(76.227,8.911) 76.227,8.951 76.35,9.075 v1(76.35,70.67) ; v1(76.6,111.92) 76.6,111.88 76.67,111.809 v1(76.67,88.123)
DC_IN2: C13.2 J10.1 R5.1 | length 129.1
  TOP w0.25: v1(7.5,67) 7.5,89.73 7.58,89.809 v1(7.58,89.85) ; v1(10.161,33.277) 10.161,43.937 10.469,44.245 10.785,44.245 v1(10.814,44.273) ; v1(11.609,112.85) R5.1 ; v1(11.75,11.75) 12.96,11.75 15.46,9.25 v1(18.75,9.25) ; v1(18.9,8.2) C13.2 19,6.15 J10.1
  BOTTOM w0.25: v1(7.5,67) 9.25,67 11.734,64.516 11.734,45.194 v1(10.814,44.273) ; v1(7.58,89.85) 9.6,89.85 11.668,91.918 11.668,102.334 11.609,102.393 v1(11.609,112.85) ; v1(10.161,33.277) 10.926,32.511 11.014,32.511 11.75,31.775 v1(11.75,11.75) ; v1(18.9,8.2) 18.9,9.059
DC_IN3: C12.2 J8.1 R4.1 | length 57.2
  TOP w0.25: v1(11,33.5) 11,35.975 12.375,37.35 R4.1 ; v1(12.275,12.5) 12.279,12.496 12.85,12.496 15.346,10 20.25,10 20.75,9.5 v1(29.15,9.5) ; J8.1 29,6.1 C12.2 v1(29.15,8.225)
  BOTTOM w0.25: v1@11.025,33.5 11.025,33.475 12.25,32.25 12.25,12.525 v1(12.275,12.5) ; v1(29.15,8.225) v1(29.15,9.5)
DC_IN4: C9.2 J1.1 R1.1 | length 69.4
  TOP w0.25: v1(38.75,9.25) v1(75.732,9.25) ; v1(38.779,8.2) 38.779,6.25 39,6.029 J1.1 ; v1(75.825,29.25) 75.825,29.291 75.975,29.441 75.975,30.675 R1.1
  BOTTOM w0.25: v1(38.75,9.25) 38.764,9.236 38.764,8.214 v1(38.779,8.2) ; v1(75.732,9.25) 75.732,9.857 75.825,9.95 v1(75.825,29.25)
DC_IN5: C10.2 J4.1 R2.1 | length 34.9
  TOP w0.25: J4.1 49,5.95 C10.2 49.05,7.854 49.196,8 69.75,8 70.9,6.85 R2.1
"Electrode 1": C3.2 J7.1 R3.2 | length 8.8
  TOP w0.25: C3.2 J7.1@75,123.75 ; R3.2 75.525,119.9 75,120.425 J7.1@75,123.75 ; J7.1 J7.1@75,123.75
"Electrode 2": J11.1 T2C.8 T2D.8 T9C.3 T9D.3 | length 43.7
  TOP w0.25: T9D.3 61.85,99.851 ; T9C.3 61.85,99.851 ; v1(69.05,99.851) 61.85,99.851 ; v1(73.5,99.75) J11.1
  BOTTOM w0.25: v1(69.05,99.851) 69.649,99.851 69.75,99.75 v1(73.5,99.75)
"Electrode 3": J9.1 T2A.8 T2B.8 T9A.3 T9B.3 | length 51.2
  TOP w0.25: T9B.3@65.39,32.75 T9B.3 T9A.3 65.39,62.5 v1(68,62.5) ; v1(73.5,65) J9.1
  BOTTOM w0.25: v1(68,62.5) 70.5,65 v1(73.5,65)
"Electrode 4": C1.2 J2.1 R1.2 | length 15.6
  TOP w0.25: C1.2 75.475,51.166 75,50.691 75,41.75 J2.1 75.75,37.25 R1.2
"Electrode 5": C2.2 J5.1 R2.2 | length 9.6
  TOP w0.25: R2.2 74,16.625 75.375,18 J5.1 75,18.75 C2.2
GND: B5.1 B6.1 B7.1 B8.1 B9.1 B10.1 C6.2 C7.2 C9.1 C10.1 C11.1 C12.1 C13.1 J1.2 J4.2 J6.2 J8.2 J10.2 J20.1 J21.1 | length 39.8
  TOP w0.25: J6.2@6.46,1.04 6.46,5.61 C11.1 ; v1(8.65,9.75) J21.1 v1(13.5,9.75) ; v1(10.5,81) J20.1 v1(13,83) ; v1(12.25,85.5) C7.2 ; J10.2@16.46,1.04 16.7,1.28 16.7,5.85 C13.1 ; v1(18.25,17) C6.2 v1(19.75,18.05) ; J8.2@26.46,1.04 26.46,1.487 27.35,2.377 C12.1 ; J1.2@36.46,1.04 36.46,5.86 C9.1 ; J4.2@46.46,1.04 46.46,1.622 47.25,2.412 C10.1
GNDchA: C8A.1 D1A.2 IC5A.7 J25A.1 R13A.2 R14A.1 R17A.2 T1A.2 T1A.3 T1A.4 T1A.5 T1A.6 T1A.7 T2A.2 T2A.3 T2A.4 T2A.5 T2A.6 T2A.7 T4A.2 T6A.3 T8A.2 T9A.2 | length 47.9
  TOP w0.25: R17A.2 19.05,67.55 19.721,66.879 19.721,66.835 v1(19.75,66.806) ; v1(27.725,71.45) 27.725,70.9 T4A.2@27.8,70.825 ; T4A.2@27.8,70.675 T4A.2 27.65,70.153 27.858,69.945 28.835,69.945 R14A.1 ; T6A.3 v1(33.65,70.175) ; v1(37.625,62.79) 37.625,61.915 37.25,61.54 T8A.2 36.87,61.52 T1A.6 41.02,61.54 v1(43.25,61.54) ; T1A.2 v1(43.25,56.44) ; T1A.3 v1(43.25,57.71) ; T1A.4 v1(43.25,58.98) ; T1A.5 v1(43.25,60.25) ; T1A.7 v1(43.25,62.79) ; v1(44.86,55.17) T2A.7 ; v1(44.86,56.44) T2A.6 47.02,56.42 T9A.2 v1(51.75,55.5) ; v1(44.86,57.71) T2A.5 ; v1(44.86,58.98) T2A.4 ; v1(44.86,60.25) T2A.3 ; v1(44.86,61.52) T2A.2 ; IC5A.7 v1(47.35,65.55) ; v1(49,66.86) C8A.1 ; D1A.2 v1(51.5,67.85) ; R13A.2 v1(54,69.065)
  BOTTOM w0.25: v1(44.86,55.17) v1(44.86,56.44)
GNDchB: C8B.1 D1B.2 IC5B.7 J25B.1 R13B.2 R14B.1 R17B.2 T1B.2 T1B.3 T1B.4 T1B.5 T1B.6 T1B.7 T2B.2 T2B.3 T2B.4 T2B.5 T2B.6 T2B.7 T4B.2 T6B.3 T8B.2 T9B.2 | length 47.9
  TOP w0.25: R17B.2 19.05,37.8 19.721,37.129 19.721,37.085 v1(19.75,37.056) ; v1(27.725,41.7) 27.725,41.15 T4B.2@27.8,41.075 ; T4B.2@27.8,40.925 T4B.2 27.65,40.403 27.858,40.195 28.835,40.195 R14B.1 ; T6B.3 v1(33.65,40.425) ; v1(37.625,33.04) 37.625,32.165 37.25,31.79 T8B.2 36.87,31.77 T1B.6 41.02,31.79 v1(43.25,31.79) ; T1B.2 v1(43.25,26.69) ; T1B.3 v1(43.25,27.96) ; T1B.4 v1(43.25,29.23) ; T1B.5 v1(43.25,30.5) ; T1B.7 v1(43.25,33.04) ; v1(44.86,25.42) T2B.7 ; v1(44.86,26.69) T2B.6 47.02,26.67 T9B.2 v1(51.75,25.75) ; v1(44.86,27.96) T2B.5 ; v1(44.86,29.23) T2B.4 ; v1(44.86,30.5) T2B.3 ; v1(44.86,31.77) T2B.2 ; IC5B.7 v1(47.35,35.8) ; v1(49,37.11) C8B.1 ; D1B.2 v1(51.5,38.1) ; R13B.2 v1(54,39.315)
  BOTTOM w0.25: v1(44.86,25.42) v1(44.86,26.69)
GNDchC: C8C.1 D1C.2 IC5C.7 J25C.1 R13C.2 R14C.1 R17C.2 T1C.2 T1C.3 T1C.4 T1C.5 T1C.6 T1C.7 T2C.2 T2C.3 T2C.4 T2C.5 T2C.6 T2C.7 T4C.2 T6C.3 T8C.2 T9C.2 | length 47.9
  TOP w0.25: R17C.2 19.05,127.05 19.721,126.379 19.721,126.335 v1(19.75,126.306) ; v1(27.725,130.95) 27.725,130.4 T4C.2@27.8,130.325 ; T4C.2@27.8,130.175 T4C.2 27.65,129.653 27.858,129.445 28.835,129.445 R14C.1 ; T6C.3 v1(33.65,129.675) ; v1(37.625,122.29) 37.625,121.415 37.25,121.04 T8C.2 36.87,121.02 T1C.6 41.02,121.04 v1(43.25,121.04) ; T1C.2 v1(43.25,115.94) ; T1C.3 v1(43.25,117.21) ; T1C.4 v1(43.25,118.48) ; T1C.5 v1(43.25,119.75) ; T1C.7 v1(43.25,122.29) ; v1(44.86,114.67) T2C.7 ; v1(44.86,115.94) T2C.6 47.02,115.92 T9C.2 v1(51.75,115) ; v1(44.86,117.21) T2C.5 ; v1(44.86,118.48) T2C.4 ; v1(44.86,119.75) T2C.3 ; v1(44.86,121.02) T2C.2 ; IC5C.7 v1(47.35,125.05) ; v1(49,126.36) C8C.1 ; D1C.2 v1(51.5,127.35) ; R13C.2 v1(54,128.565)
  BOTTOM w0.25: v1(44.86,114.67) v1(44.86,115.94)
GNDchD: C8D.1 D1D.2 IC5D.7 J25D.1 R13D.2 R14D.1 R17D.2 T1D.2 T1D.3 T1D.4 T1D.5 T1D.6 T1D.7 T2D.2 T2D.3 T2D.4 T2D.5 T2D.6 T2D.7 T4D.2 T6D.3 T8D.2 T9D.2 | length 47.9
  TOP w0.25: R17D.2 19.05,97.3 19.721,96.629 19.721,96.585 v1(19.75,96.556) ; v1(27.725,101.2) 27.725,100.65 T4D.2@27.8,100.575 ; T4D.2@27.8,100.425 T4D.2 27.65,99.903 27.858,99.695 28.835,99.695 R14D.1 ; T6D.3 v1(33.65,99.925) ; v1(37.625,92.54) 37.625,91.665 37.25,91.29 T8D.2 36.87,91.27 T1D.6 41.02,91.29 v1(43.25,91.29) ; T1D.2 v1(43.25,86.19) ; T1D.3 v1(43.25,87.46) ; T1D.4 v1(43.25,88.73) ; T1D.5 v1(43.25,90) ; T1D.7 v1(43.25,92.54) ; v1(44.86,84.92) T2D.7 ; v1(44.86,86.19) T2D.6 47.02,86.17 T9D.2 v1(51.75,85.25) ; v1(44.86,87.46) T2D.5 ; v1(44.86,88.73) T2D.4 ; v1(44.86,90) T2D.3 ; v1(44.86,91.27) T2D.2 ; IC5D.7 v1(47.35,95.3) ; v1(49,96.61) C8D.1 ; D1D.2 v1(51.5,97.6) ; R13D.2 v1(54,98.815)
  BOTTOM w0.25: v1(44.86,84.92) v1(44.86,86.19)
HV_0.7K: J13.1 R7.1 | length 3.4
  TOP w0.25: R7.1 J13.1
HV_1K: J12.1 R6.1 | length 5.1
  TOP w0.25: J12.1 R6.1@12.25,28.853
NetC4_2: C4.2 R4.2 T1A.8 T8A.3 | length 27.5
  TOP w0.25: R4.2 15.225,43.65 15.75,44.175 15.75,51 19.5,54.75 C4.2 19.5,60 20.75,61.25 24.5,61.25 T8A.3
NetC5_2: C5.2 R5.2 T1C.8 T8C.3 | length 18.3
  TOP w0.25: C5.2 13.75,122.75 13.75,122 v1(15.25,120.5) 15.25,119.675 14.725,119.15 R5.2 ; v1(20.2,120.5) 20.229,120.529 20.729,120.529 20.95,120.75 24.5,120.75 T8C.3
  BOTTOM w0.25: v1(15.25,120.5) v1(20.2,120.5)
NetC6_1: C6.1 R6.2 T1B.8 T8B.3 | length 17.1
  TOP w0.25: C6.1 18.25,29.1 R6.2 ; R6.2@18.579,29.329 18.579,29.682 18.925,30.029 19.779,30.029 21.25,31.5 24.5,31.5 T8B.3
NetC7_1: C7.1 R7.2 T1D.8 T8D.3 | length 17.9
  TOP w0.25: R7.2 12.5,91.25 C7.1 v1(15.5,91) ; v1(20.75,91) 24.5,91 T8D.3
  BOTTOM w0.25: v1(15.5,91) v1(20.75,91)
NetIC5A_1: IC5A.1 R14A.2 R28A.2 T3A.1 T6A.1 | length 21.1
  TOP w0.25: R14A.2 R14A.2@29.02,70.72 ; T3A.1 T6A.1 29.425,71.125 R14A.2@29.02,70.72 ; IC5A.1 38.635,65.725 38.635,66.665 38.55,66.75 34.64,66.75 34.25,67.14 34.25,68.335 34.06,68.525 31.245,68.525 30.245,67.525 R28A.2 29.92,67.8 29.92,68.596 29.693,68.823 29.693,70.147 29.445,70.395 29.345,70.395 R14A.2@29.02,70.72
NetIC5A_2: IC5A.2 IC5A.3 IC5A.5 IC5A.9 IC5A.11 IC5A.13 | length 30.2
  TOP w0.25: IC5A.2 40.08,66.604 40.226,66.75 41.3,66.75 41.3,65.6 IC5A.3 41.525,65.375 41.525,64.475 41.75,64.25 43.89,64.25 ; IC5A.13 40.08,72.08 40.5,72.5 42.62,72.5 ; IC5A.11 42.62,72.5 ; IC5A.5 43.89,64.25 ; IC5A.9 45.335,71.125 45.335,72.5 ; 45.615,72.5 42.62,72.5 ; 45.65,72.5 46.48,72.5 ; 46.498,72.482 47.35,71.63 47.35,69.37 45.805,67.825 45.805,64.66 45.395,64.25 43.89,64.25
NetIC5A_4: IC5A.4 IC5A.6 IC5A.8 IC5A.10 IC5A.12 R21A.1 | length 23.6
  TOP w0.25: R21A.1 36.8,67.5 37.625,67.5 37.845,67.72 42.228,67.72 ; IC5A.12 41.35,68.877 ; 41.5,67.75 41.35,67.9 41.35,68.877 ; 42.25,67.75 42.62,67.38 IC5A.4 ; IC5A.10 43.89,68.78 ; IC5A.6 45.16,66.56 44.86,66.86 44.86,68.78 ; IC5A.8 46.43,69.43 46.25,69.25 45.869,69.25 45.399,68.78 44.86,68.78 ; 41.35,68.877 41.447,68.78 43.89,68.78 ; 43.89,68.78 44.86,68.78
NetIC5B_1: IC5B.1 R14B.2 R28B.2 T3B.1 T6B.1 | length 21.1
  TOP w0.25: R14B.2 R14B.2@29.02,40.97 ; T3B.1 T6B.1 29.425,41.375 R14B.2@29.02,40.97 ; IC5B.1 38.635,35.975 38.635,36.915 38.55,37 34.64,37 34.25,37.39 34.25,38.585 34.06,38.775 31.245,38.775 30.245,37.775 R28B.2 29.92,38.05 29.92,38.846 29.693,39.073 29.693,40.397 29.445,40.645 29.345,40.645 R14B.2@29.02,40.97
NetIC5B_2: IC5B.2 IC5B.3 IC5B.5 IC5B.9 IC5B.11 IC5B.13 | length 30.2
  TOP w0.25: IC5B.2 40.08,36.854 40.226,37 41.3,37 41.3,35.85 IC5B.3 41.525,35.625 41.525,34.725 41.75,34.5 43.89,34.5 ; IC5B.13 40.08,42.33 40.5,42.75 42.62,42.75 ; IC5B.11 42.62,42.75 ; IC5B.5 43.89,34.5 ; IC5B.9 45.335,41.375 45.335,42.75 ; 45.615,42.75 42.62,42.75 ; 45.65,42.75 46.48,42.75 ; 46.498,42.732 47.35,41.88 47.35,39.62 45.805,38.075 45.805,34.91 45.395,34.5 43.89,34.5
NetIC5B_4: IC5B.4 IC5B.6 IC5B.8 IC5B.10 IC5B.12 R21B.1 | length 23.6
  TOP w0.25: R21B.1 36.8,37.75 37.625,37.75 37.845,37.97 42.228,37.97 ; IC5B.12 41.35,39.127 ; 41.5,38 41.35,38.15 41.35,39.127 ; 42.25,38 42.62,37.63 IC5B.4 ; IC5B.10 43.89,39.03 ; IC5B.6 45.16,36.81 44.86,37.11 44.86,39.03 ; IC5B.8 46.43,39.68 46.25,39.5 45.869,39.5 45.399,39.03 44.86,39.03 ; 41.35,39.127 41.447,39.03 43.89,39.03 ; 43.89,39.03 44.86,39.03
NetIC5C_1: IC5C.1 R14C.2 R28C.2 T3C.1 T6C.1 | length 21.1
  TOP w0.25: R14C.2 R14C.2@29.02,130.22 ; T3C.1 T6C.1 29.425,130.625 R14C.2@29.02,130.22 ; IC5C.1 38.635,125.225 38.635,126.165 38.55,126.25 34.64,126.25 34.25,126.64 34.25,127.835 34.06,128.025 31.245,128.025 30.245,127.025 R28C.2 29.92,127.3 29.92,128.096 29.693,128.323 29.693,129.647 29.445,129.895 29.345,129.895 R14C.2@29.02,130.22
NetIC5C_2: IC5C.2 IC5C.3 IC5C.5 IC5C.9 IC5C.11 IC5C.13 | length 30.2
  TOP w0.25: IC5C.2 40.08,126.104 40.226,126.25 41.3,126.25 41.3,125.1 IC5C.3 41.525,124.875 41.525,123.975 41.75,123.75 43.89,123.75 ; IC5C.13 40.08,131.58 40.5,132 42.62,132 ; IC5C.11 42.62,132 ; IC5C.5 43.89,123.75 ; IC5C.9 45.335,130.625 45.335,132 ; 45.615,132 42.62,132 ; 45.65,132 46.48,132 ; 46.498,131.982 47.35,131.13 47.35,128.87 45.805,127.325 45.805,124.16 45.395,123.75 43.89,123.75
NetIC5C_4: IC5C.4 IC5C.6 IC5C.8 IC5C.10 IC5C.12 R21C.1 | length 23.6
  TOP w0.25: R21C.1 36.8,127 37.625,127 37.845,127.22 42.228,127.22 ; IC5C.12 41.35,128.377 ; 41.5,127.25 41.35,127.4 41.35,128.377 ; 42.25,127.25 42.62,126.88 IC5C.4 ; IC5C.10 43.89,128.28 ; IC5C.6 45.16,126.06 44.86,126.36 44.86,128.28 ; IC5C.8 46.43,128.93 46.25,128.75 45.869,128.75 45.399,128.28 44.86,128.28 ; 41.35,128.377 41.447,128.28 43.89,128.28 ; 43.89,128.28 44.86,128.28
NetIC5D_1: IC5D.1 R14D.2 R28D.2 T3D.1 T6D.1 | length 21.1
  TOP w0.25: R14D.2 R14D.2@29.02,100.47 ; T3D.1 T6D.1 29.425,100.875 R14D.2@29.02,100.47 ; IC5D.1 38.635,95.475 38.635,96.415 38.55,96.5 34.64,96.5 34.25,96.89 34.25,98.085 34.06,98.275 31.245,98.275 30.245,97.275 R28D.2 29.92,97.55 29.92,98.346 29.693,98.573 29.693,99.897 29.445,100.145 29.345,100.145 R14D.2@29.02,100.47
NetIC5D_2: IC5D.2 IC5D.3 IC5D.5 IC5D.9 IC5D.11 IC5D.13 | length 30.2
  TOP w0.25: IC5D.2 40.08,96.354 40.226,96.5 41.3,96.5 41.3,95.35 IC5D.3 41.525,95.125 41.525,94.225 41.75,94 43.89,94 ; IC5D.13 40.08,101.83 40.5,102.25 42.62,102.25 ; IC5D.11 42.62,102.25 ; IC5D.5 43.89,94 ; IC5D.9 45.335,100.875 45.335,102.25 ; 45.615,102.25 42.62,102.25 ; 45.65,102.25 46.48,102.25 ; 46.498,102.232 47.35,101.38 47.35,99.12 45.805,97.575 45.805,94.41 45.395,94 43.89,94
NetIC5D_4: IC5D.4 IC5D.6 IC5D.8 IC5D.10 IC5D.12 R21D.1 | length 23.6
  TOP w0.25: R21D.1 36.8,97.25 37.625,97.25 37.845,97.47 42.228,97.47 ; IC5D.12 41.35,98.627 ; 41.5,97.5 41.35,97.65 41.35,98.627 ; 42.25,97.5 42.62,97.13 IC5D.4 ; IC5D.10 43.89,98.53 ; IC5D.6 45.16,96.31 44.86,96.61 44.86,98.53 ; IC5D.8 46.43,99.18 46.25,99 45.869,99 45.399,98.53 44.86,98.53 ; 41.35,98.627 41.447,98.53 43.89,98.53 ; 43.89,98.53 44.86,98.53
NetJ22A_1: J22A.1 R11A.1 R12A.2 R28A.1 | length 27.9
  TOP w0.25: R12A.2 25.068,67.318 R11A.1 25.797,67.368 ; R28A.1 28.321,67.152 28.321,66.712 28.153,66.543 26.134,66.543 25.943,66.734 25.943,67.222 25.797,67.368 ; J22A.1 30.765,75.44 26.654,71.329 26.654,70.078 26.668,70.064 26.668,68.813 25.943,68.088 25.943,67.515 25.87,67.441 25.797,67.368
NetJ22B_1: J22B.1 R11B.1 R12B.2 R28B.1 | length 27.9
  TOP w0.25: R12B.2 25.068,37.568 R11B.1 25.797,37.618 ; R28B.1 28.321,37.402 28.321,36.962 28.153,36.793 26.134,36.793 25.943,36.984 25.943,37.472 25.797,37.618 ; J22B.1 30.765,45.69 26.654,41.579 26.654,40.328 26.668,40.314 26.668,39.063 25.943,38.338 25.943,37.765 25.87,37.691 25.797,37.618
NetJ22C_1: J22C.1 R11C.1 R12C.2 R28C.1 | length 27.9
  TOP w0.25: R12C.2 25.068,126.818 R11C.1 25.797,126.868 ; R28C.1 28.321,126.652 28.321,126.212 28.153,126.043 26.134,126.043 25.943,126.234 25.943,126.722 25.797,126.868 ; J22C.1 30.765,134.94 26.654,130.829 26.654,129.578 26.668,129.564 26.668,128.313 25.943,127.588 25.943,127.015 25.87,126.941 25.797,126.868
NetJ22D_1: J22D.1 R11D.1 R12D.2 R28D.1 | length 27.9
  TOP w0.25: R12D.2 25.068,97.068 R11D.1 25.797,97.118 ; R28D.1 28.321,96.902 28.321,96.462 28.153,96.293 26.134,96.293 25.943,96.484 25.943,96.972 25.797,97.118 ; J22D.1 30.765,105.19 26.654,101.079 26.654,99.828 26.668,99.814 26.668,98.563 25.943,97.838 25.943,97.265 25.87,97.191 25.797,97.118
NetJ25A_2: J25A.2 R8A.1 R12A.1 | length 33.1
  TOP w0.25: R8A.1 20.1,69.5 22.75,69.5 ; R12A.1 21.95,67.368 22.75,68.168 22.75,69.5 ; J25A.2 43.782,75.44 42.606,76.615 29.04,76.615 22.75,70.325 22.75,69.5
NetJ25B_2: J25B.2 R8B.1 R12B.1 | length 33.1
  TOP w0.25: R8B.1 20.1,39.75 22.75,39.75 ; R12B.1 21.95,37.618 22.75,38.418 22.75,39.75 ; J25B.2 43.782,45.69 42.606,46.865 29.04,46.865 22.75,40.575 22.75,39.75
NetJ25C_2: J25C.2 R8C.1 R12C.1 | length 33.1
  TOP w0.25: R8C.1 20.1,129 22.75,129 ; R12C.1 21.95,126.868 22.75,127.668 22.75,129 ; J25C.2 43.782,134.94 42.606,136.115 29.04,136.115 22.75,129.825 22.75,129
NetJ25D_2: J25D.2 R8D.1 R12D.1 | length 33.1
  TOP w0.25: R8D.1 20.1,99.25 22.75,99.25 ; R12D.1 21.95,97.118 22.75,97.918 22.75,99.25 ; J25D.2 43.782,105.19 42.606,106.365 29.04,106.365 22.75,100.075 22.75,99.25
NetR8A_2: R8A.2 T5A.1 | length 1.7
  TOP w0.25: R8A.2 20.1,70.75 T5A.1
NetR8B_2: R8B.2 T5B.1 | length 1.7
  TOP w0.25: R8B.2 20.1,41 T5B.1
NetR8C_2: R8C.2 T5C.1 | length 1.7
  TOP w0.25: R8C.2 20.1,130.25 T5C.1
NetR8D_2: R8D.2 T5D.1 | length 1.7
  TOP w0.25: R8D.2 20.1,100.5 T5D.1
NetR9A_1: R9A.1 T4A.3 T5A.3 | length 10.3
  TOP w0.25: T5A.3 23.937,69.838 25.513,69.838 25.55,69.875 26.115,69.31 26.115,69.197 v1(26.143,69.168) ; v1(28.725,68.856) 28.765,68.856 29.105,68.516 29.229,68.516 29.42,68.326 29.42,66.89 29.66,66.65 30.907,66.65 31.575,67.318 R9A.1
  BOTTOM w0.25: v1(26.143,69.168) 26.762,69.168 26.843,69.25 28.115,69.25 28.122,69.243 28.298,69.243 28.685,68.856 v1(28.725,68.856)
NetR9A_2: R9A.2 R10A.2 R21A.2 T1A.1 T2A.1 T8A.1 T9A.1 | length 39
  TOP w0.25: R9A.2 33.5,67.043 33.5,66.496 33.846,66.15 35.25,66.15 36.55,66.15 R21A.2 36.8,65.95 39,63.75 44.19,63.75 ; T8A.1 36.85,55.65 37.33,55.17 T1A.1 43.75,55.17 44.19,55.61 44.19,63.75 ; T9A.1 51.5,61.75 51.5,62.644 51.354,62.79 T2A.1 47,63.604 46.854,63.75 44.19,63.75
NetR9B_1: R9B.1 T4B.3 T5B.3 | length 10.3
  TOP w0.25: T5B.3 23.937,40.088 25.513,40.088 25.55,40.125 26.115,39.56 26.115,39.447 v1(26.143,39.418) ; v1(28.725,39.106) 28.765,39.106 29.105,38.766 29.229,38.766 29.42,38.576 29.42,37.14 29.66,36.9 30.907,36.9 31.575,37.568 R9B.1
  BOTTOM w0.25: v1(26.143,39.418) 26.762,39.418 26.843,39.5 28.115,39.5 28.122,39.493 28.298,39.493 28.685,39.106 v1(28.725,39.106)
NetR9B_2: R9B.2 R10B.2 R21B.2 T1B.1 T2B.1 T8B.1 T9B.1 | length 39
  TOP w0.25: R9B.2 33.5,37.293 33.5,36.746 33.846,36.4 35.25,36.4 36.55,36.4 R21B.2 36.8,36.2 39,34 44.19,34 ; T8B.1 36.85,25.9 37.33,25.42 T1B.1 43.75,25.42 44.19,25.86 44.19,34 ; T9B.1 51.5,32 51.5,32.894 51.354,33.04 T2B.1 47,33.854 46.854,34 44.19,34
NetR9C_1: R9C.1 T4C.3 T5C.3 | length 10.3
  TOP w0.25: T5C.3 23.937,129.338 25.513,129.338 25.55,129.375 26.115,128.81 26.115,128.697 v1(26.143,128.668) ; v1(28.725,128.356) 28.765,128.356 29.105,128.016 29.229,128.016 29.42,127.826 29.42,126.39 29.66,126.15 30.907,126.15 31.575,126.818 R9C.1
  BOTTOM w0.25: v1(26.143,128.668) 26.762,128.668 26.843,128.75 28.115,128.75 28.122,128.743 28.298,128.743 28.685,128.356 v1(28.725,128.356)
NetR9C_2: R9C.2 R10C.2 R21C.2 T1C.1 T2C.1 T8C.1 T9C.1 | length 39
  TOP w0.25: R9C.2 33.5,126.543 33.5,125.996 33.846,125.65 35.25,125.65 36.55,125.65 R21C.2 36.8,125.45 39,123.25 44.19,123.25 ; T8C.1 36.85,115.15 37.33,114.67 T1C.1 43.75,114.67 44.19,115.11 44.19,123.25 ; T9C.1 51.5,121.25 51.5,122.144 51.354,122.29 T2C.1 47,123.104 46.854,123.25 44.19,123.25
NetR9D_1: R9D.1 T4D.3 T5D.3 | length 10.3
  TOP w0.25: T5D.3 23.937,99.587 25.513,99.587 25.55,99.625 26.115,99.06 26.115,98.947 v1(26.143,98.918) ; v1(28.725,98.606) 28.765,98.606 29.105,98.266 29.229,98.266 29.42,98.076 29.42,96.64 29.66,96.4 30.907,96.4 31.575,97.068 R9D.1
  BOTTOM w0.25: v1(26.143,98.918) 26.762,98.918 26.843,99 28.115,99 28.122,98.993 28.298,98.993 28.685,98.606 v1(28.725,98.606)
NetR9D_2: R9D.2 R10D.2 R21D.2 T1D.1 T2D.1 T8D.1 T9D.1 | length 39
  TOP w0.25: R9D.2 33.5,96.793 33.5,96.246 33.846,95.9 35.25,95.9 36.55,95.9 R21D.2 36.8,95.7 39,93.5 44.19,93.5 ; T8D.1 36.85,85.4 37.33,84.92 T1D.1 43.75,84.92 44.19,85.36 44.19,93.5 ; T9D.1 51.5,91.5 51.5,92.394 51.354,92.54 T2D.1 47,93.354 46.854,93.5 44.19,93.5
NetR10A_1: R10A.1 T3A.2 T6A.2 | length 6.1
  TOP w0.25: T6A.2 34.8,69.225 35.25,68.775 R10A.1
NetR10B_1: R10B.1 T3B.2 T6B.2 | length 6.1
  TOP w0.25: T6B.2 34.8,39.475 35.25,39.025 R10B.1
NetR10C_1: R10C.1 T3C.2 T6C.2 | length 6.1
  TOP w0.25: T6C.2 34.8,128.725 35.25,128.275 R10C.1
NetR10D_1: R10D.1 T3D.2 T6D.2 | length 6.1
  TOP w0.25: T6D.2 34.8,98.975 35.25,98.525 R10D.1
NetR11A_2: R11A.2 T4A.1 | length 2.3
  TOP w0.25: R11A.2 27.404,67.368 27.55,67.515 27.55,68.825 T4A.1
NetR11B_2: R11B.2 T4B.1 | length 2.3
  TOP w0.25: R11B.2 27.404,37.618 27.55,37.765 27.55,39.075 T4B.1
NetR11C_2: R11C.2 T4C.1 | length 2.3
  TOP w0.25: R11C.2 27.404,126.868 27.55,127.015 27.55,128.325 T4C.1
NetR11D_2: R11D.2 T4D.1 | length 2.3
  TOP w0.25: R11D.2 27.404,97.118 27.55,97.265 27.55,98.575 T4D.1
NetR13A_1: R13A.1 R15A.1 SC1A.P | length 11
  TOP w0.25: v1(51.5,63.75) 51.5,65.119 52.906,66.525 54,66.525 55.64,66.525 R15A.1
  BOTTOM w0.25: v2(51.4,59.11) 51.4,61.626 51.2,61.826 51.2,62.617 51.5,62.917 v1(51.5,63.75)
NetR13B_1: R13B.1 R15B.1 SC1B.P | length 11
  TOP w0.25: v1(51.5,34) 51.5,35.369 52.906,36.775 54,36.775 55.64,36.775 R15B.1